# EAGLE board ArduinoNano LearningBot 3-15-18 (EAGLE 8.4.1)

Size 100 x 80 mm. Coordinates in mm from the lower left corner, seen from the top.
Outline: 0,0 100,0 100,80 0,80 0,0
Copper layers (1*16): Top 0.035mm / dielectric 1.5mm / Bottom 0.035mm
Design rules "default": minimum track width 6mil, minimum drill 0.35mm, track to track 6mil, track to pad 6mil, pad to pad 6mil, via to via 6mil, smd to smd 6mil, copper to edge 40mil, drill to drill 6mil, minimum pad ring 10mil, minimum via ring 8mil, stop-mask expansion 4mil, vias tented up to drill 0mil, thermal gap 10mil

## Footprints (pad centres in the part's own frame; a part is rotated, then mirrored left to right if it is on the bottom)
1X02 = drill 1.016 pad 1.88: 1 0,0; 2 2.54,0
1X02_LOCK = drill 1.016 pad 1.88: 1 -0.178,0; 2 2.718,0
1X03_LOCK = drill 1.016 pad 1.88: 1 0,0.127; 2 2.54,-0.127; 3 5.08,0.127
AXIAL-0.4 = drill 0.9 pad 1.88: P$1 -5.08,0; P$2 5.08,0
332-12 = drill 0.9 pad 1.27: 1 -5,-1; 2 -5,1; 3 -3,-1; 4 -3,1; 5 -1,-1; 6 -1,1; 7 1,-1; 8 1,1; 9 3,-1; 10 3,1; 11 5,-1; 12 5,1
NANO = drill 0.8 long: 3.3V -10.16,24.13; 5V -10.16,-1.27; A0 -10.16,19.05; A1 -10.16,16.51; A2 -10.16,13.97; A3 -10.16,11.43; A4 -10.16,8.89; A5 -10.16,6.35; A6 -10.16,3.81; A7 -10.16,1.27; AREF -10.16,21.59; D2 5.08,1.27; D3 5.08,3.81; D4 5.08,6.35; D5 5.08,8.89; D6 5.08,11.43; D7 5.08,13.97; D8 5.08,16.51; D9 5.08,19.05; D10 5.08,21.59; D11 5.08,24.13; D12 5.08,26.67; D13 -10.16,26.67; GND -10.16,-6.35; GND1 5.08,-1.27; RAW -10.16,-8.89; RST -10.16,-3.81; RST1 5.08,-3.81; RX1 5.08,-6.35; TX0 5.08,-8.89 | drill 0.8: ICSP1 -5.08,-10.16; ICSP2 -5.08,-7.62; ICSP3 -2.54,-10.16; ICSP4 -2.54,-7.62; ICSP5 0,-10.16; ICSP6 0,-7.62
1X04_LOCK = drill 1.016 pad 1.88 square: 1 0,0.127 | drill 1.016 pad 1.88: 2 2.54,-0.127; 3 5.08,0.127; 4 7.62,-0.127

## Placement (x,y rotation side)
BATTERYPACK  [1X02]  -46.99,48.26 0 top  (outside the outline)
IRLED  [1X02_LOCK]  -35.56,53.34 0 top  (outside the outline)
IRRECEIVER  IRM3638TR ( OUT-GND-VCC)  [1X03_LOCK]  -36.83,43.18 0 top  (outside the outline)
LDR1  [1X02_LOCK]  -41.91,53.34 0 top  (outside the outline)
LDR2  [1X02_LOCK]  -48.26,53.34 0 top  (outside the outline)
LDR_RESISTOR1  10k  [AXIAL-0.4]  -19.05,58.42 0 top  (outside the outline)
LDR_RESISTOR2  10k  [AXIAL-0.4]  -31.75,58.42 0 top  (outside the outline)
LED_RESISTOR  220  [AXIAL-0.4]  -44.45,58.42 0 top  (outside the outline)
SERVO1  [1X03_LOCK]  -20.32,53.34 0 top  (outside the outline)
SERVO2  [1X03_LOCK]  -29.21,53.34 0 top  (outside the outline)
SWITCH  332-12  [332-12]  -39.37,6.35 0 top  (outside the outline)
U$1  NANO  [NANO]  -20.32,11.43 0 top  (outside the outline)
ULTRASONICSENSOR  [1X04_LOCK]  -31.75,48.26 0 top  (outside the outline)

## Library data of the parts
BATTERYPACK IRLED IRRECEIVER LDR1 LDR2 SERVO1 SERVO2 = SparkFun-Connectors
LDR_RESISTOR1 LDR_RESISTOR2 LED_RESISTOR = SparkFun-Passives
SWITCH = con-garry
U$1 = Arduino-clone
ULTRASONICSENSOR = SparkFun-Connectors; PROD_ID: CONN-09696

## Nets
A0: LDR2.2 LDR_RESISTOR1.P$1 U$1.A1
A1: LDR1.2 LDR_RESISTOR2.P$1 U$1.A0
ARDUINORAW: SWITCH.6 U$1.RAW
GND: BATTERYPACK.1 SWITCH.1
GND-ISO: IRRECEIVER.2 LDR_RESISTOR1.P$2 LDR_RESISTOR2.P$2 LED_RESISTOR.P$1 SERVO1.1 SERVO2.1 U$1.GND ULTRASONICSENSOR.4
GNDARDUINO: SWITCH.5 U$1.GND1
IRGND: IRLED.1 LED_RESISTOR.P$2
IRLED: IRLED.2 U$1.D2
IRRECEIVER: IRRECEIVER.3 U$1.D4
RAW: BATTERYPACK.2 SWITCH.2
SERVO1: SERVO1.3 U$1.D5
SERVO2: SERVO2.3 U$1.D3
ULTRASONICSENSOR: U$1.D7 ULTRASONICSENSOR.2 ULTRASONICSENSOR.3
VCC: IRRECEIVER.1 LDR1.1 LDR2.1 SERVO1.2 SERVO2.2 U$1.5V ULTRASONICSENSOR.1

## Tracks (layer width: path | path; a pad name or v marks a point on that pad's centre or on a via)
A0  (2 unrouted)
A1  (2 unrouted)
ARDUINORAW  (1 unrouted)
GND  (1 unrouted)
GND-ISO  (7 unrouted)
GNDARDUINO  (1 unrouted)
IRGND  (1 unrouted)
IRLED  (1 unrouted)
IRRECEIVER  (1 unrouted)
RAW  (1 unrouted)
SERVO1  (1 unrouted)
SERVO2  (1 unrouted)
ULTRASONICSENSOR  (2 unrouted)
VCC  (6 unrouted)